# Altium PCB arduboy_v1.PcbDoc
Units mil, origin at the board's own origin, x right, y up, seen from the top; angles counter-clockwise.
Board outline 2559.06 x 1377.95 mil, 2 copper layers (Top Layer, Bottom Layer); 38 components, 37 nets, 186 pads, 38 vias.
Unrouted connection lines stored in the file: 52.
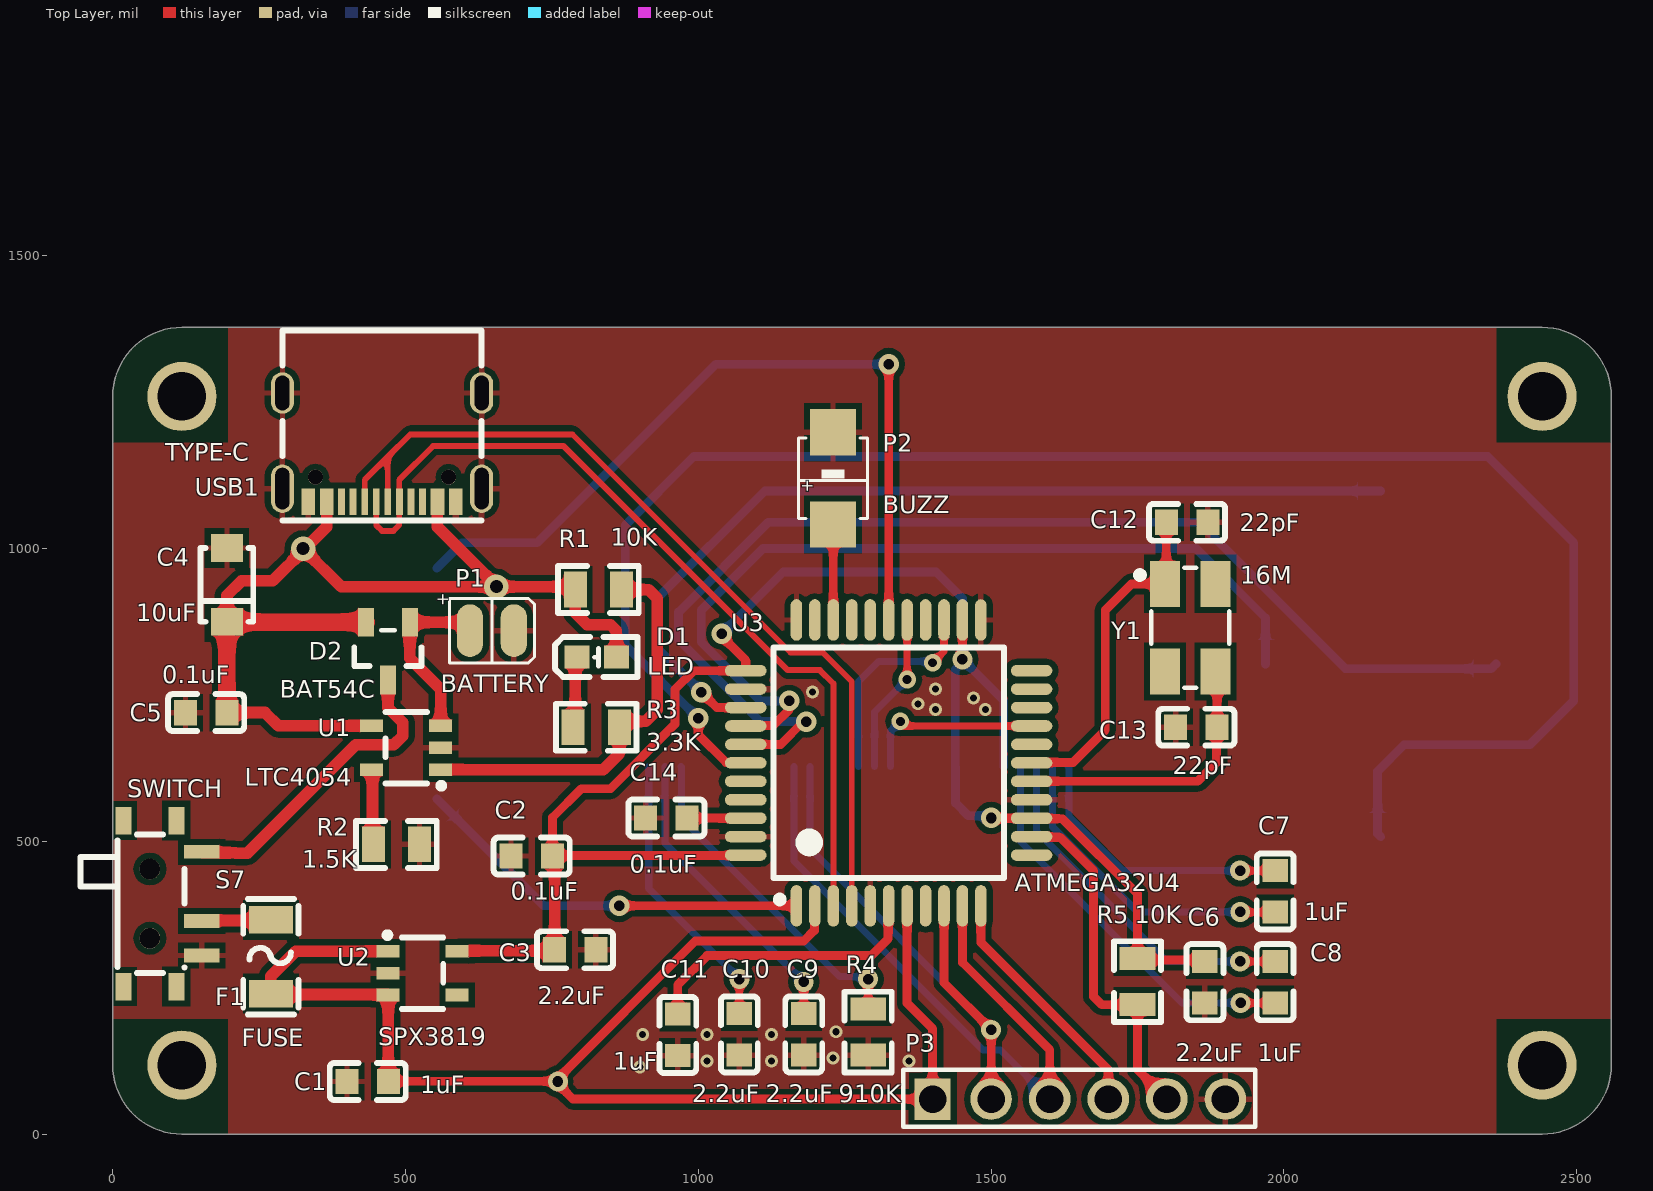
[diagram p0: Top Layer view]
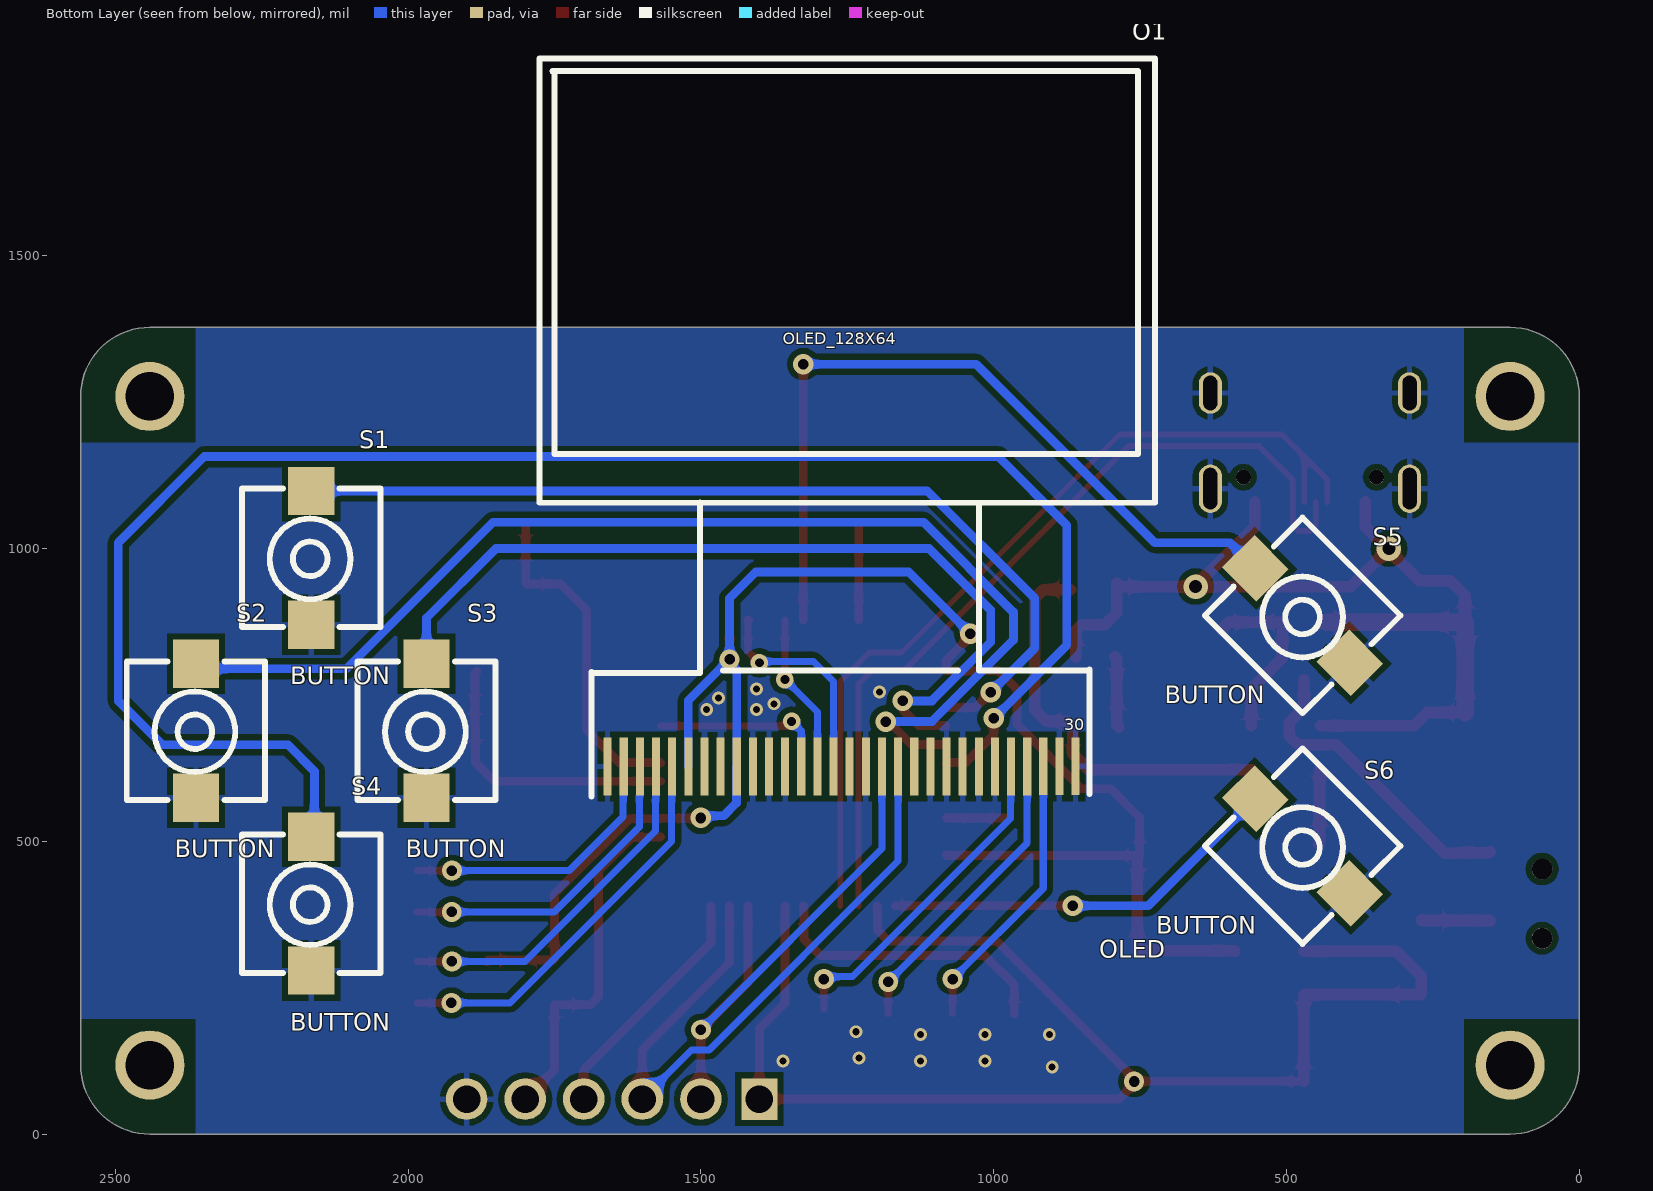
[diagram p1: Bottom Layer view, seen from below]
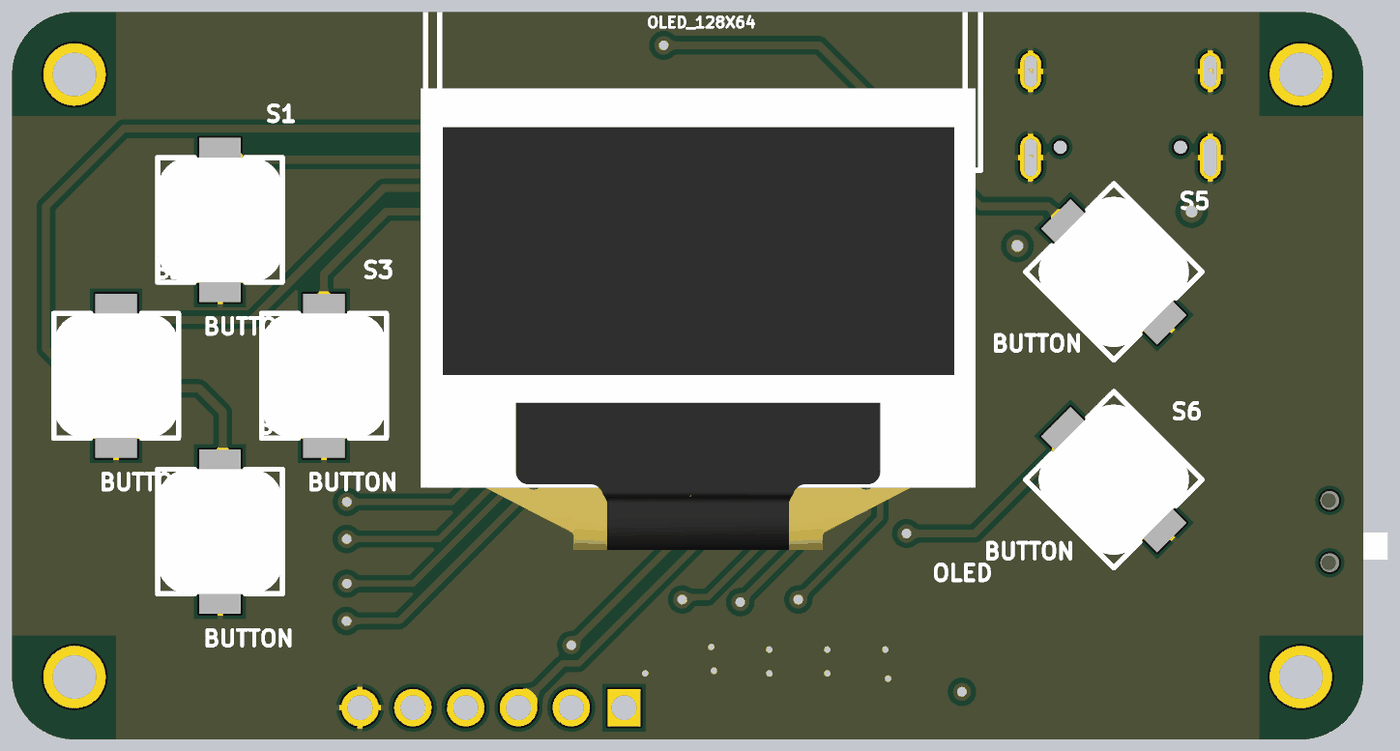
[diagram p2: 3D render of the assembled board from below, using the file's embedded part models]

## Layer stack, top to bottom
Top Solder: solder mask 0.4, Solder Resist, Dk 3.5
Top Layer: signal copper 1.4
Dielectric 1: dielectric 12.6, FR-4, Dk 4.8
Bottom Layer: signal copper 1.4
Bottom Solder: solder mask 0.4, Solder Resist, Dk 3.5

## Board outline
0,118.11 0,1259.84 cw(c118.11,1259.84) 118.11,1377.95 2440.94,1377.95 cw(c2440.94,1259.84) 2559.06,1259.84 2559.06,118.11 cw(c2440.94,118.11) 2440.94,0 118.11,0 cw(c118.11,118.11)

## Design rules (kind name [scope] priority, off if disabled: settings)
Clearance [All] p1: gap=-5 ignorepadtopadclearanceinfootprint=FALSE
HoleToHoleClearance [All] p1: gap=0 allowstackedmicrovias=TRUE
MinimumSolderMaskSliver [All] p1: minsoldermaskwidth=0
PolygonConnect [All] p1: connectstyle=Relief reliefconductorwidth=10 reliefentries=4 polygonreliefangle="90 Angle" airgapwidth=10
RoutingVias [All] p1: holewidth=28 width=50 viastyle="Through Hole" minholewidth=12 minwidth=22 maxholewidth=28 maxwidth=50
SilkToSilkClearance [All] p1: silktosilkclearance=0
SilkToSolderMaskClearance [IsPad] p1: minsilkscreentomaskgap=0 clearancetoexposedcopper=TRUE
SolderMaskExpansion [All] p1: expansion=4
Width [All] p1: maxlimit=100 minlimit=10 preferedwidth=10
26 further rules are at their usual default settings.

## Components (designator, comment, footprint, x,y, rotation, side; value= is the part's Value field where it differs from the comment)
C1 "1uF" CAP0603 400,90 r0 top
C2 "0.1uF" CAP0603 680,475 r0 top
C3 "2.2uF" CAP0603 825,315 r180 top
C4 "10uF" 10uFCAP3216 195,875 r90 top
C5 "0.1uF" CAP0603 195,720 r180 top
C6 "2.2uF" CAP0603 1865,224.13 r90 top
C7 "1uF" CAP0603 1985,379.13 r90 top
C8 "1uF" CAP0603 1985,224.13 r90 top
C9 "2.2uF" CAP0603 1180,135 r90 top
C10 "2.2uF" CAP0603 1070,135 r90 top
C11 "1uF" CAP0603 965,134.13 r90 top
C12 "22pF" CAP0603 1870,1045 r180 top
C13 "22pF" CAP0603 1815,695 r0 top
C14 "0.1uF" CAP0603 910,540 r0 top
D1 "LED" LED0603 860,815 r0 top
D2 "BAT54C" BAT54CSOT23-3 470,825 r90 top
F1 "FUSE" FUSE1206 270,365.99 r270 top
O1 "OLED" OLED30P 1259.84,688.98 r180 bottom
P1 "BATTERY" BATTERY 610,860 r270 top
P2 "BUZZ" BUZZ 1230,1120 r90 top
P3 "6PIN" 6PIN254 1400,60 r0 top
R1 "10K" RES0805 868.74,930 r180 top
R2 "1.5K" RES0805 523.74,495 r180 top
R3 "3.3K" RES0805 786.26,695 r0 top
R4 "910K" RES0805 1290,135 r90 top
R5 "10K" RES0805 1750,300 r270 top
S1 "BUTTON" SKP_BUTTON 2165.35,984.25 r90 bottom
S2 "BUTTON" SKP_BUTTON 2362.2,688.98 r90 bottom
S3 "BUTTON" SKP_BUTTON 1968.5,688.98 r90 bottom
S4 "BUTTON" SKP_BUTTON 2165.35,393.7 r90 bottom
S5 "BUTTON" SKP_BUTTON 472.44,885.83 r45 bottom
S6 "BUTTON" SKP_BUTTON 472.44,492.13 r45 bottom
S7 "SWITCH" SWITCH_BUTTON 85,393.7 r270 top
U1 "LTC4054" LTC4054 560,622.6 r90 top
U2 "SPX3819" SPX3819 470,312.4 r270 top
U3 "ATMEGA32U4" ATMEGA32U4AU 1167.52,390 r0 top
USB1 "TYPE-C" TYPE-C 629.92,1102.36 r180 top
Y1 "16M" CRYSTAL 1840,865 r90 top

## Footprints (in the part's own frame and the unit in brackets; to place one, negate y for a bottom-side part, rotate by r counter-clockwise, add the part's x,y. Pads: shape width x height; smd on the part's side, far side on the other; paste and mask are expansions set on the pad)
6PIN254 [mm]
  rect 1.575x1.8 hole 1.2: 1(0,0)
  round 1.8 hole 1.2: 2(2.54,0) 3(5.08,0) 4(7.62,0) 5(10.16,0) 6(12.7,0)
  silkscreen extent -1.27,-1.2 14,1.27
10uFCAP3216 [mm]
  rect 1.2x1.4 smd: 1(0,0) 2(3.2,0)
  silkscreen extent 0,-1.14 3.2,1.14
ATMEGA32U4AU [mm]
  oval 0.5x1.8 smd: 1(0,0) 2(0.8,0) 3(1.6,0) 4(2.4,0) 5(3.2,0) 6(4,0) 7(4.8,0) 8(5.6,0) 9(6.4,0) 10(7.2,0) 11(8,0) 23(8,12.4) 24(7.2,12.4) 25(6.4,12.4) 26(5.6,12.4) 27(4.8,12.4) 28(4,12.4) 29(3.2,12.4) 30(2.4,12.4) 31(1.6,12.4) 32(0.8,12.4) 33(0,12.4)
  oval 1.8x0.5 smd: 12(10.2,2.2) 13(10.2,3) 14(10.2,3.8) 15(10.2,4.6) 16(10.2,5.4) 17(10.2,6.2) 18(10.2,7) 19(10.2,7.8) 20(10.2,8.6) 21(10.2,9.4) 22(10.2,10.2) 34(-2.2,10.2) 35(-2.2,9.4) 36(-2.2,8.6) 37(-2.2,7.8) 38(-2.2,7) 39(-2.2,6.2) 40(-2.2,5.4) 41(-2.2,4.6) 42(-2.2,3.8) 43(-2.2,3) 44(-2.2,2.2)
  silkscreen extent -1,0.12 9,11.2
BAT54CSOT23-3 [mm]
  rect 1.25x0.7 smd: 1(1.25,-0.95) 2(1.25,0.95) 3(-1.25,0)
  silkscreen extent -0.65,-1.46 0.9,1.46
BATTERY [mil]
  oval 90x45 smd: 1(0,0) 2(0,75)
  silkscreen extent -55,-35 55,110
BUZZ [mm]
  rect 2x2 smd: 1(-2,0) 2(2,0)
  silkscreen extent -1.75,-1.5 1.75,1.5
CAP0603 [mm]
  rect 1x1.1 smd: 1(0,0) 2(1.8,0)
  silkscreen extent -0.75,-0.8 2.55,0.8
CRYSTAL [mm]
  rect 2x1.3 smd: 1(1.9,1.1) 2(-1.9,1.1) 3(-1.9,-1.1) 4(1.9,-1.1)
  silkscreen extent -2.6,-1.7 2.6,2.33
FUSE1206 [mm]
  rect 1.2x1.9 smd: 1(0,0) 2(3.2,0)
  silkscreen extent -0.9,-1.2 4.1,1.2
LED0603 [mil]
  rect 43x39 smd: 1(0,0) 2(-67,0)
  silkscreen extent -105,-34 36,34
LTC4054 [mm]
  rect 0.55x1 smd: 1(0,0) 2(0.95,0) 3(1.9,0) 4(1.9,3) 5(0,3)
  silkscreen extent -0.83,-0.15 2.5,2.4
OLED30P [mil]
  rect 13.8x98.4 smd: 1(-399.57,-61.07) 2(-371.81,-60.99) 3(-344.25,-60.99) 4(-316.69,-60.99) 5(-289.13,-60.99) 6(-261.57,-60.99) 7(-234.01,-60.99) 8(-206.46,-60.99) 9(-178.9,-60.99) 10(-151.34,-60.99) 11(-123.78,-60.99) 12(-96.22,-60.99) 13(-68.66,-60.99) 14(-41.1,-60.99) 15(-13.54,-60.99) 16(14.02,-60.99) 17(41.58,-60.99) 18(69.13,-60.99) 19(96.69,-60.99) 20(124.25,-60.99) 21(151.81,-60.99) 22(179.37,-60.99) 23(206.93,-60.99) 24(234.49,-60.99) 25(262.05,-60.99) 26(289.61,-60.99) 27(317.17,-60.99) 28(344.53,-60.93) 29(372.05,-60.89) 30(399.57,-60.89)
  silkscreen extent -516,-112 535,1148, body extent -526,-331 526,544, height 152
RES0805 [mm]
  rect 1x1.55 smd: 1(0,0) 2(2,0)
  silkscreen extent -0.75,-1.02 2.75,1.02
SKP_BUTTON [mm]
  rect 2.1x2 smd: 1(-2.899,0) 2(2.899,0)
  silkscreen extent -3,-3 3,3, body extent -3,-3 3,3, height 5
SPX3819 [mm]
  rect 0.55x1 smd: 1(0,0) 2(0.95,0) 3(1.9,0) 4(1.9,3) 5(0,3)
  silkscreen extent -0.83,-0.15 2.5,2.4
SWITCH_BUTTON [mm]
  rect 0.6x1.524 smd: 1(-2.25,1.7) 2(0.75,1.7) 3(2.25,1.7)
  rect 1.2x0.7 smd: 4(-3.6,-1.7) 4(-3.6,0.6) 4(3.6,-1.7) 4(3.6,0.6)
  round 0.9 hole 0.9 unplated: ""(-1.5,-0.55) ""(1.5,-0.55)
  silkscreen extent -3,-3.55 3,0.95, body extent -3.9,-3.35 3.9,1.85, height 1.4
TYPE-C [mm]
  oval 1x2.099 hole 0.61 slot 1.8 at 90 deg: 1(0,0) 2(8.64,0)
  oval 1x1.799 hole 0.61 slot 1.5 at 90 deg: 3(0,-4.15) 4(8.64,-4.15)
  rect 0.6x1.15 smd: A1B12(1.12,0.575) A4B9(1.92,0.575) B1A12(7.52,0.575) B4A9(6.72,0.575)
  rect 0.3x1.15 smd: A5(3.07,0.575) A6(4.07,0.575) A7(4.57,0.575) A8(2.57,0.575) B5(6.07,0.575) B6(5.07,0.575) B7(3.57,0.575) B8(5.57,0.575)
  round 0.65 hole 0.65 unplated: ""(1.43,-0.5) ""(7.21,-0.5)
  silkscreen extent 0,-6.87 8.64,1.39

## Part data
C1 C2 C3 C4 C5 C6 C7 C8 C9 C10 C11 C12 C13 C14: library part CAP, "CAP"
O1: "0.96 128x64OLED"
R1 R2 R3 R4 R5: library part RES, "电阻"
Y1: library part CRYSTAL, "CRYSTAL"

## Free pads (board coordinates)
  round 118.11 hole 82.68: 1(118.11,118.11) 1(118.11,1259.84) 1(2440.94,118.11) 1(2440.94,1259.84)

## Via types
v1: diameter 22, hole 12, Top Layer to Bottom Layer, tented both sides, 15 vias
v2: diameter 34, hole 18, Top Layer to Bottom Layer, tented both sides, 10 vias
v3: diameter 35, hole 18, Top Layer to Bottom Layer, tented both sides, 8 vias
v4: diameter 30, hole 15, Top Layer to Bottom Layer, tented both sides, 3 vias
v5: diameter 42, hole 22, Top Layer to Bottom Layer, tented both sides, 2 vias

## Nets (pads, with @x,y where several pads share a name; then routed paths per layer and width w, separated by ;. In a path a pad name is that pad's centre, name@x,y a point inside that pad or via, vN(x,y) a via of type N, cw(c..) or ccw(c..) an arc to the next point about the centre after c; other vN are vias at no path point)
3.3V: C2.2 C3.2 C6.2 O1.6 O1.9 R5.1 U2.5 U3.14 U3.24 U3.34 U3.44 | length 2985.6
  Top Layer w15: v3@1042.5,857.5 1042.5,847.5 1080.91,809.09 U3.34 992.08,791.57 960,759.5 960,700 850,590 800,590 750.87,540.87 C2.2 751.67,475.81 1080.1,475.81 U3.44 ; v2(1450.98,810.98) U3.24 ; v3(1500,540) 1500.4,539.6 U3.14 1569.99,538.7 1621.65,538.7 1750,410.36 R5.1 1752.5,297.5 1862.5,297.5 C6.2
  Top Layer w20: U2.5 588.94,313.23 747.36,313.23 C3.2@754.13,320 ; C3.2 754.57,315.43 C2.2@754.57,474.57
  Bottom Layer w15: v3(1040,855) 1145,960 1405.98,960 1450.98,915 v2(1450.98,810.98) ; v3(1500,540) 1496.17,543.83 1461.17,543.83 1439.34,565.66 1439.34,627.39 O1.9 1438.74,793.6 1450.98,805.84 v2(1450.98,810.98) ; O1.6 1521.41,740.55 v2(1450.98,810.98)
+5: C1.2 F1.2 P3.1 U2.1 U2.3 U3.2 U3.7 | length 2477.8
  Top Layer w15: C1.2@470.43,90.43 v2@755.43,90.43 ; U3.2 1198.12,389.1 1198.12,348.12 1180,330 995,330 v2@755.43,90.43 ; U3.7 1356.5,223.5 1400,180 P3.1 785.87,60 v2@755.43,90.43
  Top Layer w20: U2.1 312.4,312.4 270,270 F1.2 271.58,238.42 469.17,238.42 U2.3 470.43,237.17 C1.2@470.43,90.43
  other v2: 760,90
BEEP: P2.1 U3.31 | length 163.3
  Top Layer w15: P2.1 1230.51,1040.75 U3.31
CLK: O1.18 P3.2 U3.9 | length 941
  Top Layer w15: U3.9 1419.49,258.94 v2(1500,178.43) P3.2
  Bottom Layer w12: O1.18 1190.71,487.71 v2(1500,178.43)
CS: O1.13 U3.19 | length 311.5
  Top Layer w12: v4(1345,705) 1352.92,697.08 U3.19
  Bottom Layer w12: O1.13 1328.21,628.28 1328.21,688.21 v4(1345,705)
DC: O1.15 U3.25 | length 369.7
  Top Layer w12: v4(1400,805) 1419.49,824.49 U3.25
  Top Layer w15: U3.25@1418.6,877.3 U3.25
  Bottom Layer w12: O1.15 1273.38,773.38 1307.5,807.5 1397.5,807.5 v4(1400,805)
GND: C1.1 C2.1 C3.1 C4.2 C5.2 C6.1 C9.1 C10.1 C11.1 C12.1 C13.1 C14.1 O1.1 O1.7 O1.8 O1.10 O1.11 O1.12 O1.16 O1.17 O1.21 O1.22 O1.23 O1.24 O1.25 O1.29 O1.30 P1.2 P2.2 P3.6 R2.1 R4.1 S1.1 S2.1 S3.1 S4.1 S5.1 S6.1 S7.3 U1.2 U2.2 U3.5 U3.15 U3.23 U3.33 U3.35 U3.43 USB1.1 USB1.2 USB1.3 USB1.4 USB1.A1B12 USB1.B1A12
  other v1: 900,115 1015,125 1125,125 1360,125 1230,130 905,170 1015,170 1125,170 1235,175 1405,725 1490,725 1375,735 1470,745 1195,755 1405,760
MOSI: O1.19 P3.3 U3.10 | length 1158.4
  Top Layer w15: U3.10 1450.98,293.19 1600,144.17 P3.3
  Bottom Layer w12: O1.19 1163.15,466.48 1485.71,143.93 1516.07,143.93 P3.3
NetC7_1: C7.1 O1.3 | length 544.4
  Top Layer w12: v2@1925,380 v2(1925.43,379.57) 1925.87,379.13 C7.1
  Bottom Layer w12: O1.3 1604.99,627.09 1604.99,525.01 1750.43,379.57 v2(1925.43,379.57)
NetC7_2: C7.2 O1.2 | length 476.7
  Top Layer w12: v2(1925,450) C7.2
  Bottom Layer w12: O1.2 1632.55,627.09 1632.55,542.45 1725,450 v2(1925,450)
NetC8_1: C8.1 O1.5 | length 677.7
  Top Layer w12: v2(1925.87,224.13) C8.1
  Bottom Layer w12: O1.5 1549.87,627.09 1549.87,500.13 1825.61,224.39 1925.61,224.39 v2(1925.87,224.13)
NetC8_2: C8.2 O1.4 | length 610.5
  Top Layer w12: v2(1925,295) C8.2
  Bottom Layer w12: O1.4 1577.43,627.09 1577.43,517.57 1800,295 v2(1925,295)
NetC9_2: C9.2 O1.27 | length 520.4
  Top Layer w12: C9.2 v2(1180,260)
  Bottom Layer w12: O1.27 942.67,497.33 v2(1180,260)
NetC10_2: C10.2 O1.28 | length 476.3
  Top Layer w12: C10.2 v2@1070,255
  Bottom Layer w12: O1.28 915.31,419.69 v2(1070,265)
NetC11_2: C11.2 U3.6 | length 498.1
  Top Layer w15: C11.2 965,255 1015,305 1295,305 1324.1,334.1 1324.1,389.1 U3.6
NetC12_2: C12.2 U3.17 Y1.1 | length 580.5
  Top Layer w15: U3.17 1569.99,634.99 1639.99,634.99 1695,690 1695,895 1739.8,939.8 Y1.1 1799.14,942.25 C12.2
NetC13_2: C13.2 U3.16 Y1.3 | length 485.9
  Top Layer w15: U3.16 1852.59,602.59 1885,635 1885,694.13 C13.2 1885.86,787.64 Y1.3
NetC14_2: C14.2 U3.42 | length 100.2
  Top Layer w15: C14.2 981.06,539.8 1080.71,539.8 U3.42
NetD1_2: D1.2 R3.1 | length 122.8
  Top Layer w20: R3.1 789.63,698.37 789.63,811.63 D1.2
NetD2_1: D2.1 P1.1 U1.3 | length 308.6
  Top Layer w20: U1.3 560,760 507.4,812.6 D2.1 598.45,874.2 610,862.65 P1.1
NetD2_3: D2.3 S7.1 | length 533
  Top Layer w20: S7.1 153.74,480.47 209.53,480.47 210,480 230,480 415,665 480,665 495,680 495,703.09 470,728.09 D2.3
NetF1_1: F1.1 S7.2 | length 118.8
  Top Layer w20: S7.2 152.84,365.08 269.09,365.08 F1.1
NetO1_26: O1.26 R4.2 | length 573.1
  Top Layer w12: R4.2 v2(1290,265)
  Bottom Layer w12: O1.26 971.13,627.09 971.13,538.87 1240.79,269.21 1285.79,269.21 v2(1290,265)
NetP3_4: P3.4 U3.11 | length 420.1
  Top Layer w15: U3.11 1482.48,327.52 1700,110 P3.4
NetR1_1: R1.1 R3.2 U1.1 | length 696.4
  Top Layer w20: U1.1 837.6,622.6 865,650 R3.2 865,695.32 874.68,705 910,705 930,725 930,915 915,930 R1.1
NetR2_2: R2.2 U1.5 | length 129.3
  Top Layer w20: U1.5 442.62,622.6 443.45,621.77 443.45,496.56 R2.2
NetU3_3: U3.3 USB1.A7 USB1.B7 | length 1477.1
  Top Layer w10: USB1.A7 450,1040 460,1030 479.14,1030 489.37,1040.23 USB1.B7 489.37,1117.36 547.01,1175 770,1175 1152.5,792.5 1207.5,792.5 1230.51,769.49 U3.3
NetU3_4: U3.4 USB1.A6 USB1.B6 | length 1536.3
  Top Layer w10: USB1.B6 430.32,1117.36 469.69,1156.73 ; USB1.A6 469.69,1156.73 ; U3.4 1262.01,772.99 1212.5,822.5 1157.5,822.5 785,1195 507.95,1195 469.69,1156.73
POWER: C4.1 C5.1 D1.1 D2.2 R1.2 U1.4 USB1.A4B9 USB1.B4A9 | length 1841.2
  Top Layer w20: C5.1 260,720 282.6,697.4 U1.4 ; C4.1 195,920 220,945 273.27,945 v5@326.63,998.37 ; USB1.B4A9 365.35,1037.09 346.63,1018.37 ; USB1.A4B9 554.33,1037.09 v5@656.42,935 ; D1.1 860,860 850,870 810,870 790,890 R1.2 790,940.83 784.17,935 v5@656.42,935 ; v5@326.63,998.37 v5@336.63,1008.37 ; v5@326.63,998.37 v5@336.63,1008.37 ; v5@326.63,998.37 390,935 v5@656.42,935 ; v5@336.63,1008.37 346.63,1018.37 ; v5@336.63,1008.37 346.63,1018.37
  Top Layer w30: C5.1 C4.1 195.4,874.6 432.2,874.6 D2.2
  other v5: 655,935 325,1000
RES: O1.14 U3.27 | length 273.2
  Top Layer w12: v4(1356.5,776.5) U3.27
  Bottom Layer w12: O1.14 1300.94,720.94 v4(1356.5,776.5)
RST: P3.5 R5.2 U3.13 | length 607.6
  Top Layer w15: U3.13 1569.99,507.21 1617.79,507.21 1675,450 1675,235 1688.74,221.26 R5.2 1750,110 P3.5
SW1: S1.2 U3.36 | length 1589.2
  Top Layer w15: v3(1005,755) 1031.42,728.58 U3.36
  Bottom Layer w15: v3(1005,755) 930,830 930,915 1113.38,1098.38 S1.2
SW2: S2.2 U3.38 | length 2009.1
  Top Layer w15: U3.38 1140.59,665.59 1179.69,704.69 v3(1184.18,704.69)
  Bottom Layer w15: v3(1184.18,704.69) 1105.46,704.69 966.29,843.86 966.29,891.64 1119.64,1045 1855,1045 2105,795 2354.1,795 S2.2
SW3: S3.2 U3.37 | length 1481.3
  Top Layer w15: U3.37 1081.81,697.98 1127.98,697.98 1155,725 v3(1155,740)
  Bottom Layer w15: v3(1155,740) 1105.5,740 1005,840.5 1005,895 1110,1000 1850,1000 1968.5,881.5 S3.2
SW4: S4.2 U3.39 | length 3009
  Top Layer w15: v3(1000,710) 1000,682.25 1047.25,634.99 1080.01,634.99 U3.39
  Bottom Layer w15: v3(1000,710) 875,835 875,1040 992.22,1157.22 2347.78,1157.22 2495,1010 2495,740 2420,665 2205,665 2160,620 2160,513.18 S4.2
SW5: S5.2 U3.28 | length 1353
  Top Layer w15: U3.28 v3(1325,1315)
  Bottom Layer w15: S5.2 596.61,1010 725,1010 1030,1315 v3(1325,1315)
SW6: S6.2 U3.1 | length 690.1
  Top Layer w15: v3(865,390) U3.1
  Bottom Layer w15: S6.2 735.96,390 v3(865,390)
pads on no net: O1.20 S7. S7.4 U2.4 U3.8 U3.12 U3.18 U3.20 U3.21 U3.22 U3.26 U3.29 U3.30 U3.32 U3.40 U3.41 USB1. USB1.A5 USB1.A8 USB1.B5 USB1.B8 Y1.2 Y1.4

## Polygon pours and split planes (outlines as drawn)
GND on Top Layer "GND_L01_P008" (solid, remove dead copper, pour order 8): 0,1181.1 196.85,1181.1 196.85,1377.95 2362.2,1377.95 2362.2,1181.1 2559.06,1181.1 2559.06,196.85 2362.2,196.85 2362.2,0 196.85,0 196.85,196.85 0,196.85
GND on Top Layer "GND_L01_P010" (solid, remove dead copper, pour order 10): 354.33,1220.47
GND on Top Layer "GND_L01_P002" (solid, remove dead copper, pour order 2): 472.44,1279.53
GND on Bottom Layer "GND_L02_P004" (solid, remove dead copper, pour order 4): 0,1181.1 196.85,1181.1 196.85,1377.95 2362.2,1377.95 2362.2,1181.1 2559.06,1181.1 2559.06,196.85 2362.2,196.85 2362.2,0 196.85,0 196.85,196.85 0,196.85
GND on Bottom Layer "GND_L02_P006" (solid, remove dead copper, pour order 6): 98.43,1102.36

## Silkscreen, mask and mechanical layers (free items; w line width, h text height)
Mechanical 1:
  the board outline again, w20

## Text inside footprints (layer, text, board x,y; h text height)
O1: Bottom Overlay "OLED_128X64" at 1359.88,1348.97 h20; Bottom Overlay "30" at 879.28,689.47 h20
P1: Top Overlay "+" at 555,925 h20 r270
P2: Top Overlay "+" at 1195,1095 h20 r90